# EAGLE board WizFi250_EVB_SCH_V100 (EAGLE 6.4)
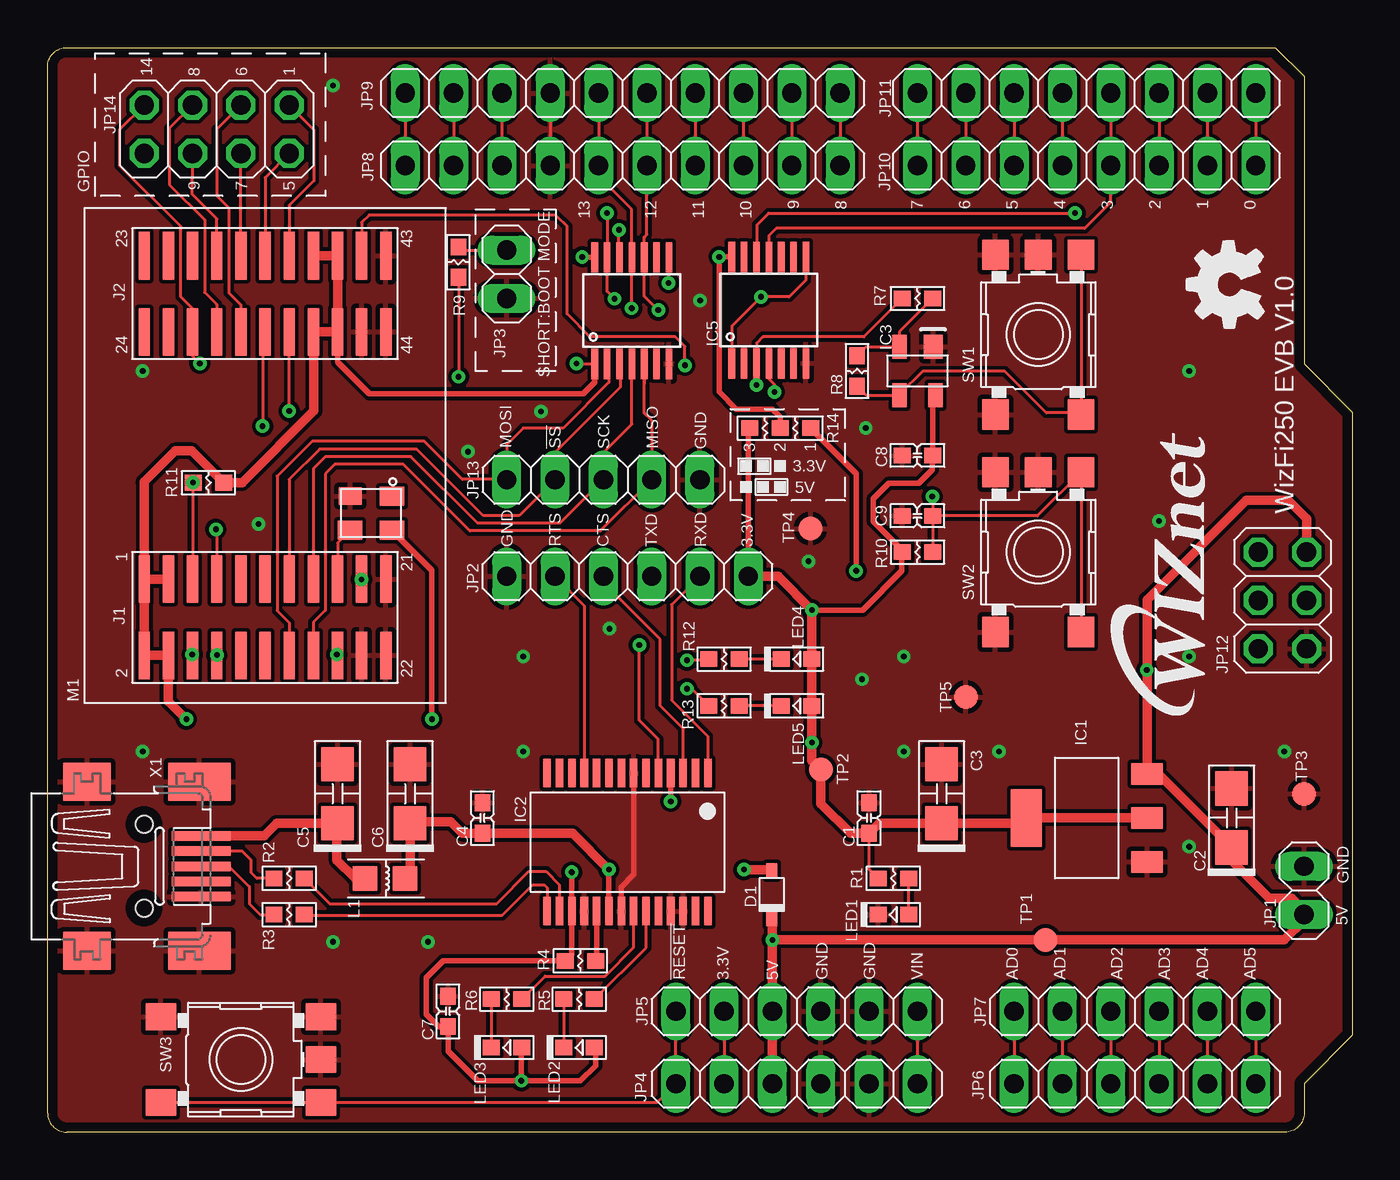
[diagram p0: board, top side]
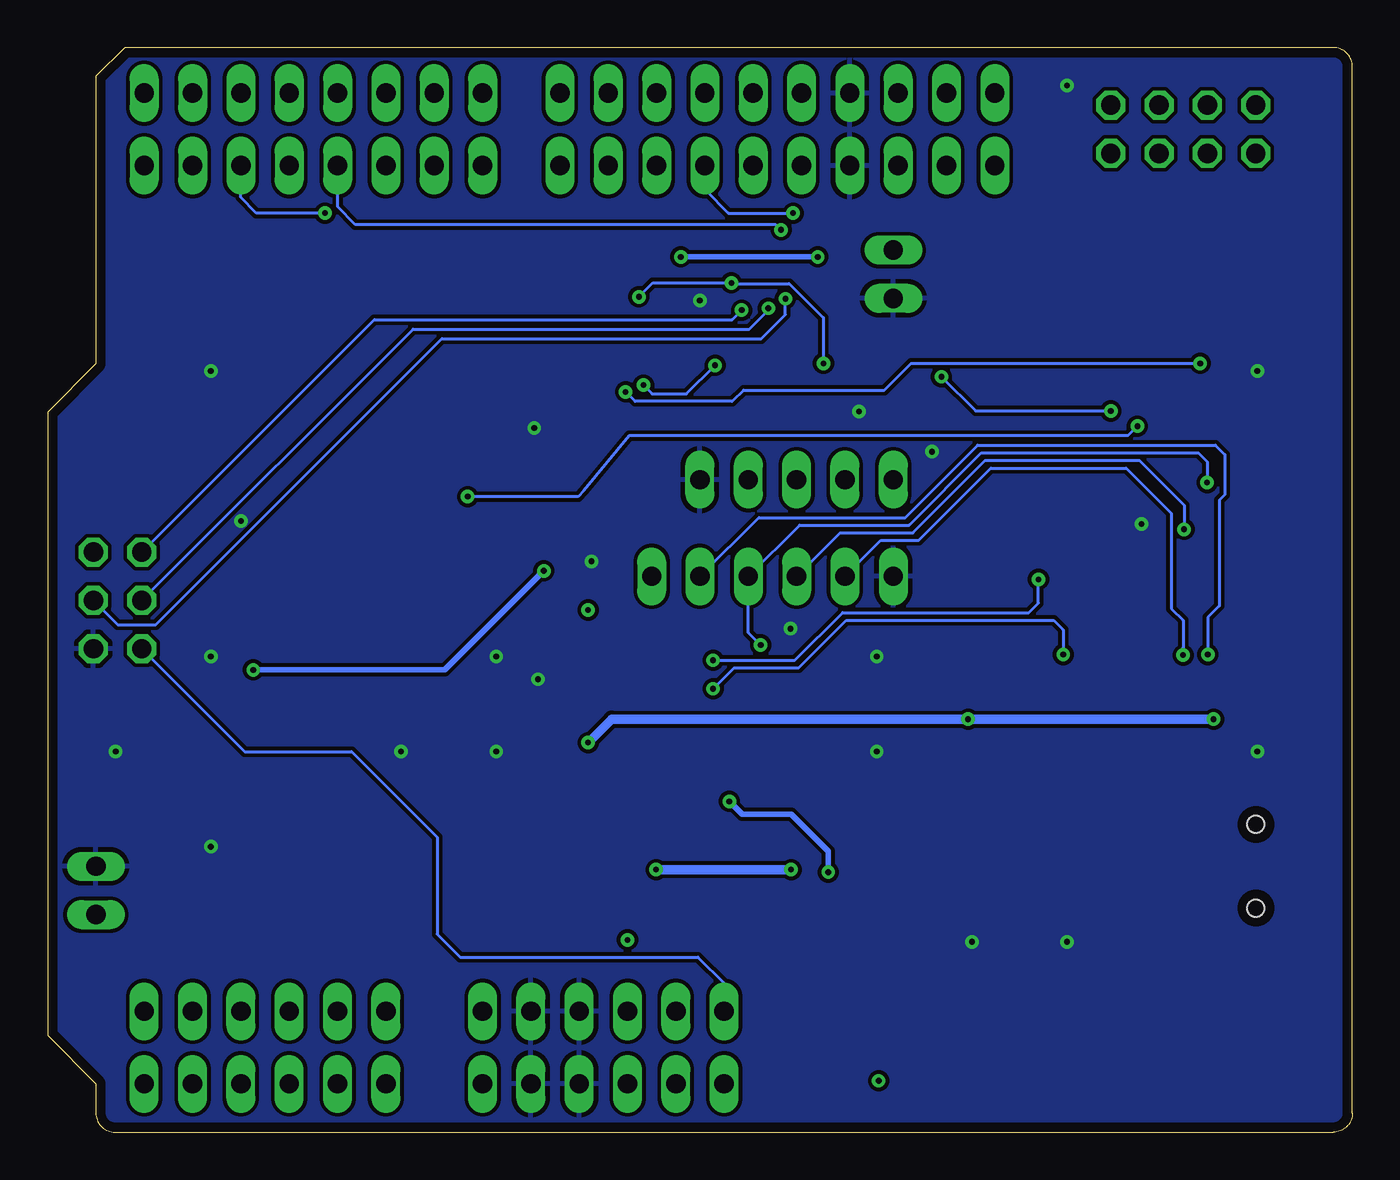
[diagram p1: board, bottom side, seen from below]

Size 68.58 x 57 mm. Coordinates in mm from the lower left corner, seen from the top.
Outline: 0,1 0,56 arc-90 1,57 64.52,57 66.04,55.5 66.04,40.39 68.58,37.85 68.58,5.08 66.04,2.54 66.04,1 arc-90 65.04,0 1,0 arc-90 0,1
Copper layers (1*16): Top 0.035mm / dielectric 1.5mm / Bottom 0.035mm
Design rules "default *": minimum track width 0.1mm, minimum drill 0.2mm, track to track 0.2mm, track to pad 0.2mm, pad to pad 0.2mm, via to via 0.2mm, smd to smd 0.15mm, copper to edge 20mil, drill to drill 0.3mm, minimum pad ring 10mil, minimum via ring 8mil, stop-mask expansion 4mil, vias tented up to drill 12mil, thermal gap 10mil

## Footprints (pad centres in the part's own frame; a part is rotated, then mirrored left to right if it is on the bottom)
C-1608 = smd 0.89 x 0.82: 1 0.8,0; 2 -0.8,0
C-3216(TANTAL) = smd 1.8 x 1.7: 1 1.55,0; 2 -1.55,0
BAT60A = smd 0.8 x 0.6: 1 1.25,0; 2 -1.25,0
SOT-223 = smd 1.143 x 1.651: 1 -2.311,-3.175; 2 0,-3.175; 3 2.311,-3.175 | smd 3 x 1.651: 4 0,3.175
SSOP28 = smd 0.4 x 1.5: 1 -4.225,-3.625; 2 -3.575,-3.625; 3 -2.925,-3.625; 4 -2.275,-3.625; 5 -1.625,-3.625; 6 -0.975,-3.625; 7 -0.325,-3.625; 8 0.325,-3.625; 9 0.975,-3.625; 10 1.625,-3.625; 11 2.275,-3.625; 12 2.925,-3.625; 13 3.575,-3.625; 14 4.225,-3.625; 15 4.225,3.625; 16 3.575,3.625; 17 2.925,3.625; 18 2.275,3.625; 19 1.625,3.625; 20 0.975,3.625; 21 0.325,3.625; 22 -0.325,3.625; 23 -0.975,3.625; 24 -1.625,3.625; 25 -2.275,3.625; 26 -2.925,3.625; 27 -3.575,3.625; 28 -4.225,3.625
MIC811SU = smd 1.016 x 1.27: 1 -0.826,-1.27 | smd 0.762 x 1.27: 2 0.953,-1.27; 3 0.953,1.27; 4 -0.953,1.27
TXS0104EPWR = smd 1.6 x 0.35: 1 -2.8,1.95; 2 -2.8,1.3; 3 -2.8,0.65; 4 -2.8,0; 5 -2.8,-0.65; 6 -2.8,-1.3; 7 -2.8,-1.95; 8 2.8,-1.95; 9 2.8,-1.3; 10 2.8,-0.65; 11 2.8,0; 12 2.8,0.65; 13 2.8,1.3; 14 2.8,1.95
1X02 = drill 1.016 long: 1 -1.27,0; 2 1.27,0
1X06 = drill 1.016 long: 1 -6.35,0; 2 -3.81,0; 3 -1.27,0; 4 1.27,0; 5 3.81,0; 6 6.35,0
1X10 = drill 1.016 long: 1 -11.43,0; 2 -8.89,0; 3 -6.35,0; 4 -3.81,0; 5 -1.27,0; 6 1.27,0; 7 3.81,0; 8 6.35,0; 9 8.89,0; 10 11.43,0
1X08 = drill 1.016 long: 1 -8.89,0; 2 -6.35,0; 3 -3.81,0; 4 -1.27,0; 5 1.27,0; 6 3.81,0; 7 6.35,0; 8 8.89,0
2X03 = drill 1.016 octagon: 1 -2.54,-1.27; 2 -2.54,1.27; 3 0,-1.27; 4 0,1.27; 5 2.54,-1.27; 6 2.54,1.27
1X05 = drill 1.016 long: 1 -5.08,0; 2 -2.54,0; 3 0,0; 4 2.54,0; 5 5.08,0
2X04 = drill 1.016 octagon: 1 -3.81,-1.27; 2 -3.81,1.27; 3 -1.27,-1.27; 4 -1.27,1.27; 5 1.27,-1.27; 6 1.27,1.27; 7 3.81,-1.27; 8 3.81,1.27
L-2012 = smd 1.3 x 1.3: 1 -1.1,0; 2 1,0
LED-1608 = smd 0.89 x 0.82: 1 -0.8,0; 2 0.8,0
WIZFI250-IFBD = smd 2.5 x 0.6: 1 -6.5,6.35; 2 -10.5,6.35; 3 -6.5,5.08; 4 -10.5,5.08; 5 -6.5,3.81; 6 -10.5,3.81; 7 -6.5,2.54; 8 -10.5,2.54; 9 -6.5,1.27; 10 -10.5,1.27; 11 -6.5,0; 12 -10.5,0; 13 -6.5,-1.27; 14 -10.5,-1.27; 15 -6.5,-2.54; 16 -10.5,-2.54; 17 -6.5,-3.81; 18 -10.5,-3.81; 19 -6.5,-5.08; 20 -10.5,-5.08; 21 -6.5,-6.35; 22 -10.5,-6.35; 23 10.5,6.35; 24 6.5,6.35; 25 10.5,5.08; 26 6.5,5.08; 27 10.5,3.81; 28 6.5,3.81; 29 10.5,2.54; 30 6.5,2.54; 31 10.5,1.27; 32 6.5,1.27; 33 10.5,0; 34 6.5,0; 35 10.5,-1.27; 36 6.5,-1.27; 37 10.5,-2.54; 38 6.5,-2.54; 39 10.5,-3.81; 40 6.5,-3.81; 41 10.5,-5.08; 42 6.5,-5.08; 43 10.5,-6.35; 44 6.5,-6.35
R-1608 = smd 0.89 x 0.82: 1 -0.8,0; 2 0.8,0
R-1608-JUMPER = smd 0.89 x 0.82: 1 -1.6,0; 2 0,0; 3 1.6,0
SKHMPXE010 = smd 1.6 x 1.4: 1 -4.2,2.25; 2 4.2,2.25; 3 -4.2,-2.25; 4 4.2,-2.25; 5 4.2,0
B1,27 = smd 1.27 x 1.27: TP 0,0
32005-201 = smd 3.1 x 0.5: 1 3,1.6; 2 3,0.8; 3 3,0; 4 3,-0.8; 5 3,-1.6 | smd 2.5 x 2: M1 -3,-4.45; M2 -3,4.45 | smd 3.3 x 2: M3 2.9,4.45; M4 2.9,-4.45 | hole 0.9: 0,2.2; 0,-2.2
OSC3225 = smd 1.3 x 1: 1 -1.1,-0.9; 3 1.1,0.9; 4 -1.1,0.9 | smd 1.2 x 0.9: 2 1.1,-0.9

## Placement (x,y rotation side)
C1  0.1uF  [C-1608]  43.18,16.51 90 top
C2  10uF/16V  [C-3216(TANTAL)]  62.23,16.51 270 top
C3  10uF/16V  [C-3216(TANTAL)]  46.99,17.78 270 top
C4  0.1uF  [C-1608]  22.86,16.51 90 top
C5  10uF/16V  [C-3216(TANTAL)]  15.24,17.78 270 top
C6  4.7uF/16V  [C-3216(TANTAL)]  19.05,17.78 270 top
C7  0.1uF  [C-1608]  21.05,6.35 90 top
C8  0.1uF  [C-1608]  45.72,35.56 180 top
C9  0.1uF  [C-1608]  45.72,32.38 180 top
D1  BAT60A  [BAT60A]  38.06,12.48 270 top
IC1  AME8815BEGT330  [SOT-223]  54.61,16.51 90 top
IC2  FT232RL  [SSOP28]  30.48,15.24 180 top
IC3  MIC811SU  [MIC811SU]  45.72,40.01 180 top
IC4  TXS0104EPWR  [TXS0104EPWR]  30.71,43.18 90 top
IC5  TXS0104EPWR  [TXS0104EPWR]  37.91,43.2 90 top
JP1  [1X02]  66.04,12.7 90 top
JP2  [1X06]  30.48,29.21 180 top
JP3  [1X02]  24.13,45.09 270 top
JP4  [1X06]  39.37,2.54 0 top
JP5  [1X06]  39.37,6.35 0 top
JP6  [1X06]  57.15,2.54 0 top
JP7  [1X06]  57.15,6.35 0 top
JP8  [1X10]  30.23,50.8 180 top
JP9  [1X10]  30.23,54.61 180 top
JP10  [1X08]  54.61,50.8 180 top
JP11  [1X08]  54.61,54.61 180 top
JP12  [2X03]  64.9,27.94 270 top
JP13  [1X05]  29.21,34.29 0 top
JP14  [2X04]  8.89,52.7 180 top
L1  MI0805K400R-10  [L-2012]  17.78,13.34 0 top
LED1  POWER  [LED-1608]  44.45,11.43 180 top
LED2  RX  [LED-1608]  27.94,4.45 180 top
LED3  TX  [LED-1608]  24.13,4.45 180 top
LED4  Wi-Fi  [LED-1608]  39.37,24.86 180 top
LED5  Mode  [LED-1608]  39.37,22.4 180 top
M1  WIZFI250-IFBD  [WIZFI250-IFBD]  11.43,35.56 90 top
R1  330R  [R-1608]  44.45,13.34 180 top
R2  22R  [R-1608]  12.7,13.34 0 top
R3  22R  [R-1608]  12.7,11.43 0 top
R4  10K  [R-1608]  28,9 0 top
R5  330R  [R-1608]  27.94,6.99 180 top
R6  330R  [R-1608]  24.13,6.99 180 top
R7  1K  [R-1608]  45.72,43.81 180 top
R8  0R  [R-1608]  42.55,40.01 90 top
R9  10K  [R-1608]  21.59,45.72 270 top
R10  10K  [R-1608]  45.72,30.48 180 top
R11  10K  [R-1608]  8.45,34.13 0 top
R12  330R  [R-1608]  35.56,24.86 180 top
R13  330R  [R-1608]  35.56,22.4 0 top
R14  0R-JUMPER  [R-1608-JUMPER]  38.5,37 180 top
SW1  W-RESET  [SKHMPXE010]  52.07,41.91 90 top
SW2  FUNCTION  [SKHMPXE010]  52.07,30.48 90 top
SW3  RESET  [SKHMPXE010]  10.16,3.81 0 top
TP1  TPB1,27  [B1,27]  52.45,10.1 0 top
TP2  TPB1,27  [B1,27]  40.64,19.05 0 top
TP3  TPB1,27  [B1,27]  66.04,17.78 0 top
TP4  TPB1,27  [B1,27]  40.1,31.72 0 top
TP5  TPB1,27  [B1,27]  48.26,22.86 0 top
U$1  [OSHP-LOGO]  64.5,41.5 90 top
U$2  [WIZNET2-LOGO]  62,21 90 top
X1  MINI-USB-SCHIELD-32005-201  [32005-201]  5.08,13.97 0 top
Y1  OSC3225  [OSC3225]  17,32.53 180 top

## Library data of the parts
C1-C9 = CAP
D1 LED1-LED5 = DIODE
IC1 = RECULATOR
IC2 = ftdichip; MPN: FT232RL; OC_FARNELL: 1146032; OC_NEWARK: 91K9918
IC3-IC5 = IC
JP1-JP14 = pinhead
L1 = INDUCTOR
M1 = WIZnet
R1-R14 = RESISTOR
SW1-SW3 = switch
TP1-TP5 = testpad
U$1 U$2 = LOGO
X1 = USB; OC_FARNELL: unknown; OC_NEWARK: unknown
Y1 = X-TAL

## Nets
!RESET: IC5.3 M1.41 R7.2
+3V3: C1.2 C3.1 C8.2 IC1.2 IC1.4 IC3.4 IC4.1 IC4.8 IC5.1 IC5.8 JP2.1 LED4.1 LED5.1 M1.1 M1.2 M1.3 M1.4 M1.37 M1.38 M1.39 M1.40 R1.2 R10.2 R11.2 R14.3 TP2.TP Y1.4
+5V: C2.1 D1.1 IC1.3 JP1.1 JP4.3 JP5.3 JP12.2 R14.1 TP1.TP
BOOT_MODE: M1.36 R9.2
CTS: IC2.3 JP2.4 M1.7
FACTORY_RESET: C9.2 M1.34 R10.1 SW2.3 SW2.4
GND: C1.1 C2.2 C3.2 C4.1 C5.2 C6.2 C7.1 C8.1 C9.1 IC1.1 IC2.7 IC2.18 IC2.21 IC2.25 IC2.26 IC3.1 IC4.7 IC5.7 JP1.2 JP2.6 JP3.2 JP4.4 JP4.5 JP5.4 JP5.5 JP8.7 JP9.7 JP12.6 JP13.5 LED1.2 M1.20 M1.21 M1.22 M1.42 M1.43 M1.44 SW1.1 SW1.2 SW1.5 SW2.1 SW2.2 SW2.5 SW3.1 SW3.2 SW3.5 TP3.TP TP4.TP TP5.TP X1.5 X1.M1 X1.M2 X1.M3 X1.M4 Y1.2
GPIO1: JP14.1 M1.35
GPIO5: JP14.2 M1.33
GPIO6: JP14.3 M1.32
GPIO7: JP14.4 M1.31
GPIO8: JP14.5 M1.30
GPIO9: JP14.6 M1.29
GPIO14: IC5.4 JP14.7 M1.28
MISO: IC4.10 JP8.5 JP9.5 JP12.1
MOSI: IC4.13 JP8.4 JP9.4 JP12.4
N$1: IC4.14 IC5.14 R14.2
N$2: R2.1 X1.2
N$3: R3.1 X1.3
N$4: LED1.1 R1.1
N$5: JP3.1 R9.1
N$6: IC2.16 R2.2
N$7: IC2.15 R3.2
N$8: IC2.19 R4.2
N$9: IC3.2 R7.1 R8.2
N$16: LED2.2 R5.2
N$17: LED3.2 R6.2
N$18: JP4.2 JP5.2
N$22: JP4.6 JP5.6
N$23: JP6.1 JP7.1
N$24: JP6.2 JP7.2
N$25: JP6.3 JP7.3
N$26: JP6.4 JP7.4
N$27: JP6.5 JP7.5
N$28: JP6.6 JP7.6
N$29: JP8.10 JP9.10
N$30: JP8.9 JP9.9
N$31: JP8.8 JP9.8
N$36: JP8.3 JP9.3
N$37: JP8.2 JP9.2
N$38: JP8.1 JP9.1
N$39: JP10.8 JP11.8
N$40: JP10.7 JP11.7
N$41: JP10.6 JP11.6
N$45: JP10.2 JP11.2
N$46: JP10.1 JP11.1
N$50: M1.17 Y1.3
N$51: M1.19 R12.2
N$52: LED4.2 R12.1
N$64: M1.18 R13.1
N$65: LED5.2 R13.2
RESET: JP4.1 JP5.1 JP12.5 SW3.3 SW3.4
RTS: IC2.11 JP2.5 M1.8
RX-LED: IC2.23 R5.1
RXD: IC2.1 JP2.2 M1.6
SCLK: IC4.11 JP8.6 JP9.6 JP12.3
SPI_MISO: IC4.5 JP13.4 M1.16
SPI_MOSI: IC4.2 JP13.1 M1.14
SPI_SCK: IC4.4 JP13.3 M1.15
SPI_SS: IC4.3 JP13.2 M1.13
SS_WIFI: IC4.12 JP10.5 JP11.5
TX-LED: IC2.22 R6.1
TXD: IC2.5 JP2.3 M1.5 R11.1
USB: C4.2 C6.1 D1.2 IC2.20 L1.2
VCC: C5.1 L1.1 X1.1
VCCIO: C7.2 IC2.4 IC2.17 LED2.1 LED3.1 R4.1
W_GPIO14: IC5.11 JP10.4 JP11.4
W_RESET: IC5.12 JP10.3 JP11.3
WI-FI_RST: IC3.3 R8.1 SW1.3 SW1.4

## Tracks (layer width: path | path; a pad name or v marks a point on that pad's centre or on a via)
!RESET  (via drill 0.3)
  Top 0.15: M1.41 16.51,47.81 16.9,48.2 26.7,48.2 27.3,47.6 27.3,43 28.5,41.8 33,41.8 33.5,41.3 v33.5,40.3 | R7.2 42.9,41.8 37.6,41.8 37.26,41.46 IC5.3 | IC5.3 | IC5.3 v37.26,39.26
  Bottom 0.15: v37.26,39.26 36.8,38.8 35,38.8 v33.5,40.3
+3V3  (via drill 0.3)
  Top 0.15: IC4.8 32.64,45.96 v32.64,44.63 | v27.8,40.4 27.82,40.38 IC4.1 | R1.2 43.18,13.8 C1.2 | IC5.8 | IC5.8 39.86,44.78 38.98,43.9 v37.5,43.9 35.96,42.36 IC5.1
  Top 0.3: IC3.4 46.52,38.58 C8.2 46.5,35.54 46.5,34.8 45.8,34.1 44.2,34.1 43.4,33.3 43.4,32.1 44.92,30.58 R10.2 44.9,30.46 44.9,29.5 42.84,27.44 v40.17,27.44 | Y1.4 20.2,29.53 v20.2,21.7 | IC4.1 28.76,39.41 28.15,38.8 16.9,38.8 15.24,40.46 M1.40 | R14.3 36.83,36.93 JP2.1
  Top 0.5: IC1.2 IC1.4 51.16,16.23 C3.1 43.7,16.23 C1.2 42.2,15.7 40.64,17.26 TP2.TP 40.17,19.52 v40.17,20.47 LED5.1 LED4.1 v40.17,27.44 38.4,29.21 JP2.1 | M1.1 M1.2 M1.4 6.35,22.65 v7.3,21.7 | M1.1 M1.3 | M1.37 M1.39 M1.40 M1.38 14,42.03 14,37.9 10.23,34.13 R11.2 7.58,35.8 6.7,35.8 5.08,34.18 M1.1
  Bottom 0.15: v27.8,40.4 27.8,42.8 29.6,44.6 32.61,44.6 v32.64,44.63 36.77,44.63 v37.5,43.9
  Bottom 0.5: v40.17,20.47 38.94,21.7 v20.2,21.7 v7.3,21.7
+5V  (via drill 0.3)
  Top 0.3: v57.77,24.29 57.78,24.3 | R14.1 42.5,34.6 v42.5,29.5
  Top 0.5: JP4.3 JP5.3 v38.1,10.1 | D1.1 38.1,11.19 v38.1,10.1 | v38.1,10.1 TP1.TP 65,10.1 66.04,11.14 JP1.1 65.9,11.57 65.9,11.8 65.4,12.3 64.2,12.3 62.23,14.27 C2.1 58.37,18.82 IC1.3 57.78,24.3 57.78,27.98 63,33.2 65.2,33.2 66.17,32.23 JP12.2
  Bottom 0.3: v42.5,29.5 47.71,24.29 v57.77,24.29
BOOT_MODE  (via drill 0.3)
  Top 0.15: R9.2 v21.6,39.7 | v12.7,37.9 M1.36
  Bottom 0.15: v21.6,39.7 19.8,37.9 v12.7,37.9
CTS  (via drill 0.3)
  Top 0.15: v8.85,31.68 8.89,31.64 M1.7 | IC2.3 33.41,21.21 32.2,22.42 32.2,25.9 29.21,28.89 JP2.4
  Bottom 0.15: JP2.4 26.92,31.5 23.1,31.5 19.3,35.3 11.2,35.3 8.85,32.95 v8.85,31.68
FACTORY_RESET  (via drill 0.3)
  Top 0.15: C9.2 R10.1 | SW2.3 SW2.4 52.02,32.38 C9.2 | M1.34 11.3,41.93 v11.3,37.1 | v46.5,33.4 46.52,33.38 C9.2
  Bottom 0.15: v11.3,37.1 11.8,36.6 38,36.6 40.4,33.7 40.7,33.4 v46.5,33.4
GND  (via drill 0.3)
  Top 0.15: JP9.7 JP8.7
  Top 0.3: IC2.7 30.81,13.55 30.14,12.88 30.14,11.63 IC2.21
  other vias: 65,20 45,20 45,25 25,25 25,20 5,40 5,20 15,10 20,10 40,30 43,37 42.8,23.8 34.3,43.7 60,40 60,25 60,15 50,20 15,55 11.08,31.96 22.1,35.76 25.94,37.87 29.53,26.46 58.41,32.12
  pour Top: 0,0 69,0 69,57 0,57
  pour Bottom: 0,0 69,0 69,57 0,57
GPIO1
  Top 0.15: JP14.1 14,52.67 14,50 12.7,48.7 M1.35
GPIO5
  Top 0.15: JP14.2 11.43,50.16 M1.33
GPIO6
  Top 0.15: JP14.3 8.9,52.72 8.9,49.2 9.53,48.57 9.53,44.11 10.16,43.48 M1.32
GPIO7
  Top 0.15: M1.31 JP14.4
GPIO8
  Top 0.15: JP14.5 6.4,52.76 6.4,49.8 8.26,47.94 8.26,44.13 8.89,43.5 M1.30
GPIO9
  Top 0.15: M1.29 8.9,48 7.6,49.3 7.6,50.1 7.62,50.12 JP14.6
GPIO14  (via drill 0.3)
  Top 0.15: JP14.7 3.8,52.7 3.8,50.8 7,47.6 7,47.58 6.99,47.57 6.99,43.91 7.6,43.3 7.6,42.08 M1.28 7.62,40.78 v8,40.4 | IC5.4 37.9,39.6 38.2,39.3 v38.2,38.9
  Bottom 0.15: v8,40.4 23.2,40.4 24.6,39 32,39 32.6,38.4 37.7,38.4 v38.2,38.9
MISO  (via drill 0.3)
  Top 0.15: JP9.5 JP8.5 31.5,47.19 31.35,47.04 IC4.10 31.36,43.94 v32.1,43.2
  Bottom 0.15: JP12.1 51.41,42.7 32.6,42.7 v32.1,43.2
MOSI  (via drill 0.3)
  Top 0.15: JP9.4 JP8.4 | IC4.13 | v29.8,43.8 29.41,44.19 IC4.13 | v29.4,48.3 v29.41,48.29 IC4.13
  Bottom 0.15: JP12.4 64.9,26.67 62.89,26.67 47.86,41.7 31.06,41.7 29.8,42.96 v29.8,43.8 | JP8.4 34,50.76 34,49.5 32.8,48.3 v29.4,48.3
N$1  (via drill 0.3)
  Top 0.3: IC5.14 | IC5.14 v35.3,46 35.3,38.9 36.2,38 38.1,38 38.5,37.6 R14.2 | v28.1,46 28.12,45.98 IC4.14 | R14.2
  Bottom 0.3: v35.3,46 v28.1,46
N$2
  Top 0.15: R2.1 11,13.34 10.7,13.64 10.7,14.3 10.23,14.77 X1.2
N$3
  Top 0.15: X1.3 8.15,13.9 9.6,13.9 10.6,12.9 10.6,12 11.17,11.43 R3.1
N$4
  Top 0.15: LED1.1 R1.1
N$5
  Top 0.15: R9.1 21.75,46.35 JP3.1
N$6
  Top 0.15: R2.2 14.84,12 23.6,12 25.3,13.7 26.2,13.7 26.91,12.99 IC2.16
N$7
  Top 0.15: R3.2 13.53,11.4 23.9,11.4 25.5,13 26.1,13 26.25,12.85 IC2.15
N$8
  Top 0.3: R4.2 28.86,9.05 IC2.19
N$9
  Top 0.15: R7.1 44.77,42.06 IC3.2 43.02,41.27 R8.2
N$16
  Top 0.15: R5.2 LED2.2
N$17
  Top 0.15: R6.2 LED3.2
N$18
  Top 0.15: JP5.2 JP4.2
N$22
  Top 0.15: JP5.6 JP4.6
N$23
  Top 0.15: JP7.1 JP6.1
N$24
  Top 0.15: JP7.2 JP6.2
N$25
  Top 0.15: JP7.3 JP6.3
N$26
  Top 0.15: JP7.4 JP6.4
N$27
  Top 0.15: JP7.5 JP6.5
N$28
  Top 0.15: JP7.6 JP6.6
N$29
  Top 0.15: JP9.10 JP8.10
N$30
  Top 0.15: JP9.9 JP8.9
N$31
  Top 0.15: JP9.8 JP8.8
N$36
  Top 0.15: JP9.3 JP8.3
N$37
  Top 0.15: JP9.2 JP8.2
N$38
  Top 0.15: JP9.1 JP8.1
N$39
  Top 0.15: JP11.8 JP10.8
N$40
  Top 0.15: JP11.7 JP10.7
N$41
  Top 0.15: JP11.6 JP10.6
N$45
  Top 0.15: JP11.2 JP10.2
N$46
  Top 0.15: JP11.1 JP10.1
N$50
  Top 0.15: Y1.3 15.24,30.97 M1.17
N$51  (via drill 0.3)
  Top 0.15: R12.2 34.7,24.8 v33.6,24.8 | M1.19 v16.5,29.05
  Bottom 0.15: v33.6,24.8 29.3,24.8 26.8,27.3 17,27.3 16.5,27.8 v16.5,29.05
N$52
  Top 0.15: LED4.2 R12.1
N$64  (via drill 0.3)
  Top 0.15: R13.1 33.86,23.3 v33.6,23.3 | M1.18 v15.2,25.1
  Bottom 0.15: v33.6,23.3 32.5,24.4 29.1,24.4 26.6,26.9 15.7,26.9 15.2,26.4 v15.2,25.1
N$65
  Top 0.15: LED5.2 R13.2
RESET
  Top 0.15: JP5.1 JP4.1 32.04,1.56 SW3.4 SW3.3
  Bottom 0.15: JP12.5 58.23,20 52.6,20 48.1,15.5 48.1,10.4 46.9,9.2 34.4,9.2 33.02,7.82 JP5.1 33.02,5.8
RTS  (via drill 0.3)
  Top 0.15: M1.8 v8.9,25.07 | JP2.5 28.2,27.68 IC2.11
  Bottom 0.15: JP2.5 24.78,31.1 22.8,31.1 19,34.9 11.9,34.9 9.52,32.52 9.52,27.51 8.9,26.89 v8.9,25.07 8.9,25.47
RX-LED
  Top 0.15: R5.1 31.45,9.7 IC2.23
RXD  (via drill 0.3)
  Top 0.15: M1.6 7.5,25.18 v7.6,25.1 | JP2.2 32.8,27.72 32.8,22.7 34.7,20.8 IC2.1
  Bottom 0.15: JP2.2 31.2,32.3 23.5,32.3 19.7,36.1 7.2,36.1 6.7,35.6 6.7,33.5 6.99,33.21 6.99,27.66 7.6,27.05 v7.6,25.1
SCLK  (via drill 0.3)
  Top 0.15: JP9.6 JP8.6 28.96,50.24 30.7,48.5 IC4.11 v30.71,43.31 v30.7,43.3
  Bottom 0.15: JP12.3 49.37,42.2 31.7,42.2 30.7,43.2 v30.7,43.3
SPI_MISO
  Top 0.15: 31.35,39.3 IC4.5 31.36,37.79 31.75,37.4 JP13.4 29.06,31.6 22.2,31.6 18.7,35.1 15.1,35.1 14.6,34.6 14.6,27.42 13.97,26.79 M1.16
SPI_MOSI
  Top 0.15: IC4.2 29.5,40.29 29.5,39.4 27.1,37 25,37 24.13,36.13 JP13.1 | 24.13,35.53 JP13.1 | JP13.1 21.8,34.3 19.8,36.3 13.9,36.3 12.07,34.47 12.07,27.41 12.7,26.78 M1.14
SPI_SCK
  Top 0.15: M1.15 13.97,34.87 14.6,35.5 19.1,35.5 22.6,32 26.92,32 JP13.3 29.22,35.72 30.71,37.21 IC4.4
SPI_SS
  Top 0.15: IC4.3 30.1,40.34 30.1,39.15 26.69,35.74 26.69,34.31 JP13.2 24.78,32.4 22.9,32.4 19.4,35.9 14.3,35.9 12.7,34.3 M1.13
SS_WIFI  (via drill 0.3)
  Top 0.15: JP11.5 JP10.5 | IC4.12 30.03,46.01 v30.03,47.42
  Bottom 0.15: v30.03,47.42 30.31,47.7 52.4,47.7 53.34,48.64 JP10.5
TX-LED
  Top 0.15: R6.1 26.14,8.2 29.3,8.2 30.8,9.71 IC2.22
TXD  (via drill 0.3)
  Top 0.15: 7.61,34.17 v7.64,34.14 R11.1 7.62,34.1 M1.5 | IC2.5 32.09,18.88 32.09,20.66 31.1,21.65 v31.1,25.6
  Bottom 0.15: v7.64,34.14 7.64,35.24 8.1,35.7 19.5,35.7 23.3,31.9 29.06,31.9 JP2.3 31.75,26.25 v31.1,25.6
USB  (via drill 0.3)
  Top 0.3: v29.5,13.8 v29.5,13.79 IC2.20
  Top 0.5: L1.2 19.05,13.61 C6.1 19.12,16.3 21.2,16.3 21.79,15.71 C4.2 27.6,15.7 v29.5,13.8 | D1.2 37.99,13.8 v36.6,13.8
  Bottom 0.5: v29.5,13.8 v36.6,13.8
VCC
  Top 0.5: X1.1 11.38,15.57 12.04,16.23 C5.1 15.2,16.19 15.2,14.3 16.16,13.34 L1.1
VCCIO  (via drill 0.3)
  Top 0.3: LED2.1 28.8,4.38 28.8,3.5 28,2.7 v24.9,2.7 | v24.9,2.7 22.6,2.7 21.05,4.25 C7.2 20.55,5.55 19.9,6.2 19.9,8.1 20.8,9 R4.1 27.55,9.36 IC2.17 v27.55,13.65 v27.55,13.66 | LED3.1 24.9,4.42 v24.9,2.7 | IC2.4 v32.75,17.38
  Bottom 0.3: v32.75,17.38 32.07,16.7 29.5,16.7 27.55,14.75 v27.55,13.66
W_GPIO14
  Top 0.15: JP11.4 JP10.4 55.88,48.88 54.5,47.5 38.3,47.5 37.91,47.11 IC5.11
W_RESET  (via drill 0.3)
  Top 0.15: JP11.3 JP10.3 | IC5.12 37.3,46.04 37.3,47.7 37.9,48.3 v54,48.3
  Bottom 0.15: v54,48.3 57.6,48.3 58.42,49.12 JP10.3
WI-FI_RST
  Top 0.15: SW1.4 SW1.3 54.23,37.8 52.5,37.8 50.3,40 46,40 44.77,38.77 IC3.3 43.02,38.73 R8.1

## Text on the board
tPlace: 14 | 8 | 6 | 1 | GPIO | 9 | 7 | 5 | SHORT:BOOT MODE | 13 | 12 | 11 | 10 | 9 | 8 | 7 | 6 | 5 | 4 | 3 | 2 | 1 | 0 | MOSI | !SS | SCK | MISO | GND | 3 | 2 | 1 | 3.3V | 5V | WizFi250 EVB V1.0 | GND | RTS | CTS | TXD | RXD | 3.3V | GND | 5V | !RESET | 3.3V | 5V | GND | GND | VIN | AD0 | AD1 | AD2 | AD3 | AD4 | AD5
tValues: GND | GND | 3.3V | GND | 5V